# EAGLE board arduiana_here (EAGLE 9.6.2)
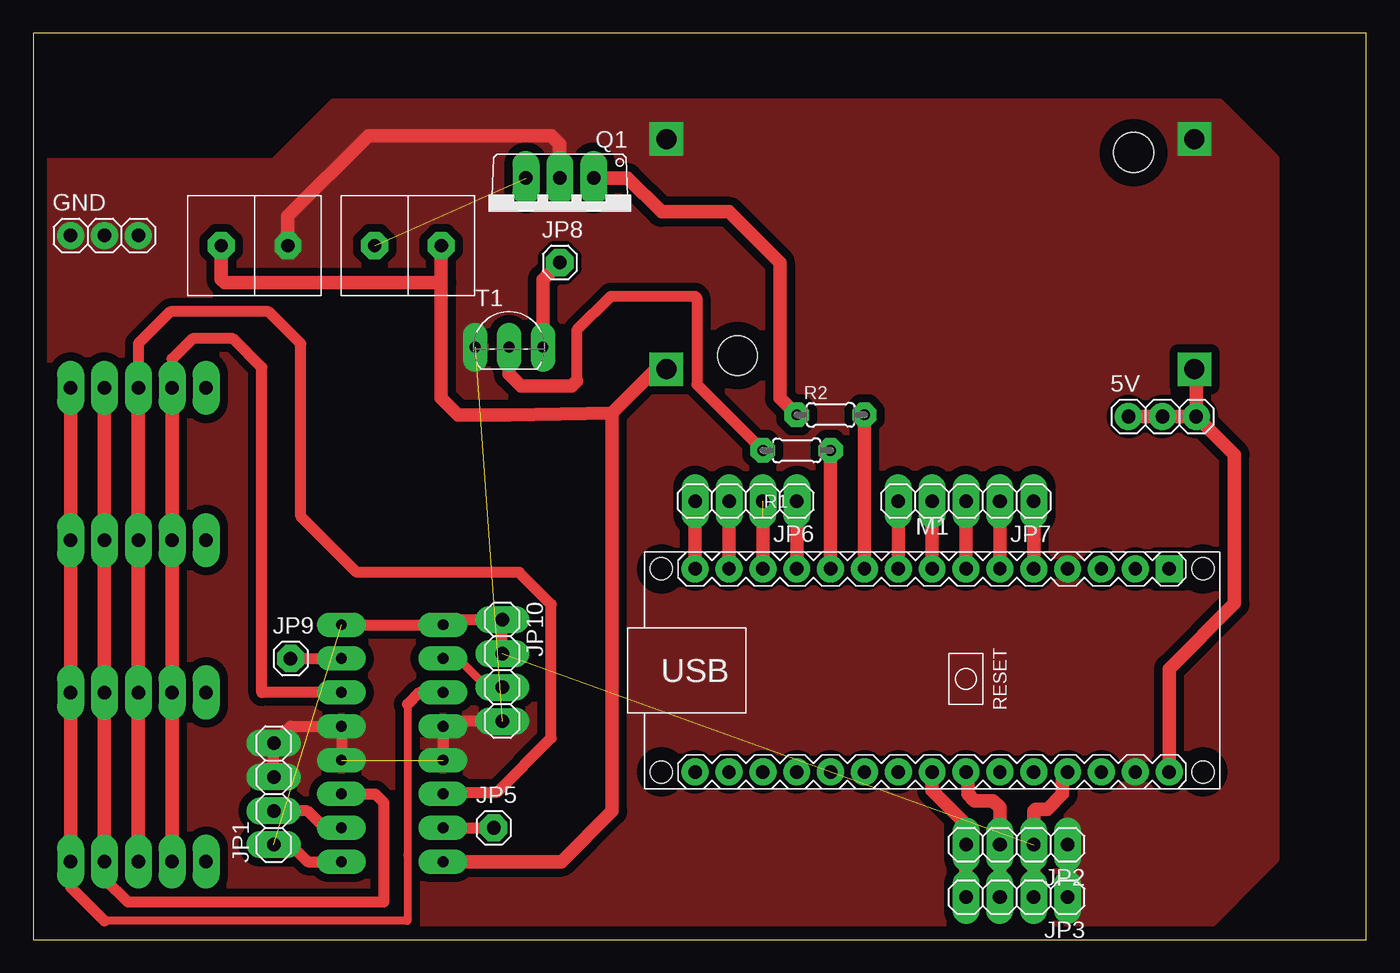
[diagram p0: board, top side]
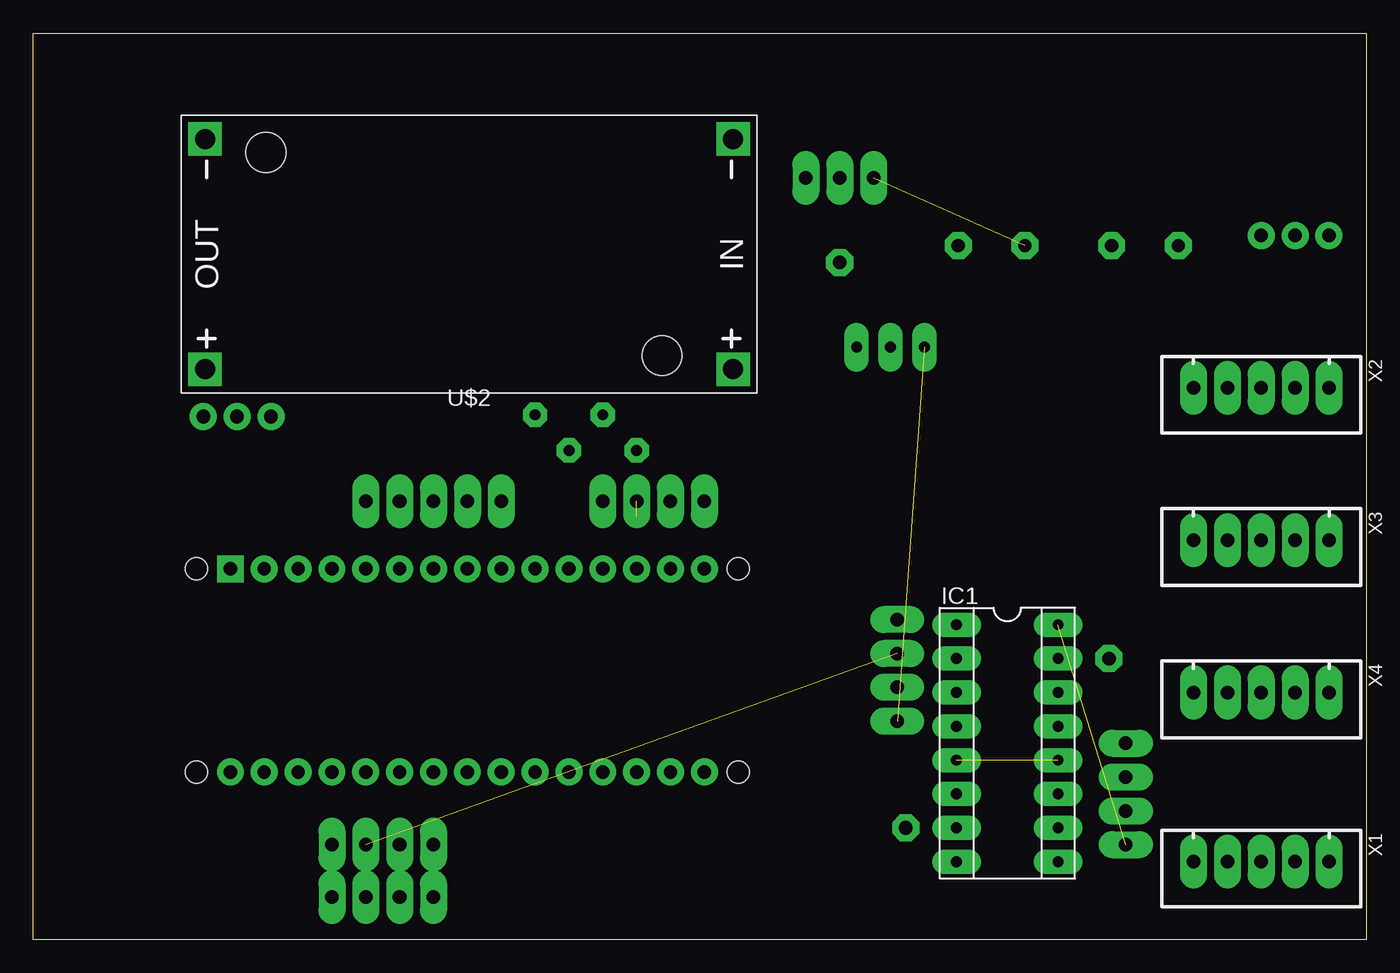
[diagram p1: board, bottom side, seen from below]

Size 100 x 68 mm. Coordinates in mm from the lower left corner, seen from the top.
Outline: 0,0 100,0 100,68 0,68 0,0
Copper layers (1*16): Top 0.035mm / dielectric 1.5mm / Bottom 0.035mm
Design rules "default *": minimum track width 6mil, minimum drill 0.35mm, track to track 6mil, track to pad 6mil, pad to pad 6mil, via to via 6mil, smd to smd 6mil, copper to edge 40mil, drill to drill 6mil, minimum pad ring 20mil, minimum via ring 8mil, stop-mask expansion 4mil, vias tented up to drill 0mil, thermal gap 0mil

## Footprints (pad centres in the part's own frame; a part is rotated, then mirrored left to right if it is on the bottom)
1X03 = drill 1.016: 1 -2.54,0; 2 0,0; 3 2.54,0
SOCKET-16 = drill 0.813 long: 1 -8.89,-3.81; 2 -6.35,-3.81; 3 -3.81,-3.81; 4 -1.27,-3.81; 5 1.27,-3.81; 6 3.81,-3.81; 7 6.35,-3.81; 8 8.89,-3.81; 9 8.89,3.81; 10 6.35,3.81; 11 3.81,3.81; 12 1.27,3.81; 13 -1.27,3.81; 14 -3.81,3.81; 15 -6.35,3.81; 16 -8.89,3.81
1X04 = drill 1.016 long: 1 -3.81,0; 2 -1.27,0; 3 1.27,0; 4 3.81,0
1X01 = drill 1.016 pad 1.93 octagon: 1 0,0
1X05 = drill 1.016 long: 1 -5.08,0; 2 -2.54,0; 3 0,0; 4 2.54,0; 5 5.08,0
ARDUINO-NANO-3.0 = drill 1 square: J1.1 17.78,7.62 | drill 1: J1.2 15.24,7.62; J1.3 12.7,7.62; J1.4 10.16,7.62; J1.5 7.62,7.62; J1.6 5.08,7.62; J1.7 2.54,7.62; J1.8 0,7.62; J1.9 -2.54,7.62; J1.10 -5.08,7.62; J1.11 -7.62,7.62; J1.12 -10.16,7.62; J1.13 -12.7,7.62; J1.14 -15.24,7.62; J1.15 -17.78,7.62; J2.1 17.78,-7.62; J2.2 15.24,-7.62; J2.3 12.7,-7.62; J2.4 10.16,-7.62; J2.5 7.62,-7.62; J2.6 5.08,-7.62; J2.7 2.54,-7.62; J2.8 0,-7.62; J2.9 -2.54,-7.62; J2.10 -5.08,-7.62; J2.11 -7.62,-7.62; J2.12 -10.16,-7.62; J2.13 -12.7,-7.62; J2.14 -15.24,-7.62; J2.15 -17.78,-7.62 | hole 1.651: -20.32,7.62; -20.32,-7.62; 20.32,-7.62; 20.32,7.62
DBCONN-1X2 = drill 1 pad 2 octagon: P0 -2.54,0; P1 2.46,0
TO220V = drill 1.016 long: 1 -2.54,-2.54; 2 0,-2.54; 3 2.54,-2.54
0204/5 = drill 0.813 pad 1.676 octagon: 1 -2.54,0; 2 2.54,0
TO92-EBC-OVAL = drill 0.813 long: B 0,-1.27; C 2.54,-1.27; E -2.54,-1.27
DC-DC-STEP-DOWN-LM2596 = drill 1.5 pad 2.5 square: IN+ -19.812,8.636; IN- -19.812,-8.636; OUT+ 19.812,8.636; OUT- 19.812,-8.636 | hole 3: -14.478,7.62; 15.24,-7.62
JST-XH-05-PACKAGE-LONG-PAD = drill 1.016 long: 1 -5.08,0; 2 -2.54,0; 3 0,0; 4 2.54,0; 5 5.08,0

## Placement (x,y rotation side)
5V  [1X03]  84.71,39.24 0 top
GND  [1X03]  5.33,52.83 0 top
IC1  [SOCKET-16]  26.92,14.73 270 bottom
JP1  [1X04]  18.03,10.92 90 top
JP2  [1X04]  73.79,7.11 180 top
JP3  [1X04]  73.79,3.17 180 top
JP5  [1X01]  34.54,8.38 0 top
JP6  [1X04]  53.47,32.89 180 top
JP7  [1X05]  69.98,32.89 180 top
JP8  [1X01]  39.5,50.8 0 top
JP9  [1X01]  19.3,21.08 0 top
JP10  [1X04]  35.18,20.19 270 top
M1  ARDUINO-NANO-3.0  [ARDUINO-NANO-3.0]  67.44,20.19 0 top
POWER  DBCONN-1X2  [DBCONN-1X2]  16.64,52.07 0 top
PUMP  DBCONN-1X2  [DBCONN-1X2]  28.07,52.07 180 top
Q1  [TO220V]  39.5,54.61 180 top
R1  [0204/5]  57.28,36.7 180 top
R2  [0204/5]  59.82,39.37 0 top
T1  2N2222  [TO92-EBC-OVAL]  35.69,45.72 0 top
U$2  DC-DC-STEP-DOWN-LM2596  [DC-DC-STEP-DOWN-LM2596]  67.31,51.44 180 bottom
X1  JST-XH-05-PIN-LONG-PAD  [JST-XH-05-PACKAGE-LONG-PAD]  7.87,5.84 180 bottom
X2  JST-XH-05-PIN-LONG-PAD  [JST-XH-05-PACKAGE-LONG-PAD]  7.87,41.4 180 bottom
X3  JST-XH-05-PIN-LONG-PAD  [JST-XH-05-PACKAGE-LONG-PAD]  7.87,29.97 180 bottom
X4  JST-XH-05-PIN-LONG-PAD  [JST-XH-05-PACKAGE-LONG-PAD]  7.87,18.54 180 bottom

## Library data of the parts
5V GND JP5 JP8 JP9 Q1 R1 R2 T1 = adafruit
IC1 = ic-package
JP1-JP3 JP6 JP7 JP10 = pinhead
M1 U$2 = diy-modules
POWER PUMP = Terminal Block Connector
X1-X4 = Rembrandt Electronics - JST XH Connectors v1-0

## Nets
3V3: M1.J2.14
GND: GND.1 GND.2 GND.3 IC1.4 IC1.5 IC1.12 IC1.13 JP1.3 JP1.4 JP2.1 JP3.1 JP10.4 M1.J1.4 M1.J2.2 POWER.P1 Q1.2 T1.E U$2.IN- U$2.OUT-
N$1: M1.J1.11 R1.1
N$2: IC1.2 JP10.3
N$3: M1.J1.10 R2.2
N$4: JP8.1 T1.C
N$5: R1.2 T1.B
N$6: Q1.1 R2.1
N$7: PUMP.P1 Q1.3
N$8: 5V.1 5V.2 5V.3 M1.J2.1 U$2.OUT+
N$9: JP2.4 JP3.4 M1.J2.8
N$10: JP2.3 JP3.3 M1.J2.7
N$12: JP7.1 M1.J1.5
N$13: JP6.1 M1.J1.12
N$14: JP6.2 M1.J1.13
N$15: JP7.2 M1.J1.6
N$16: IC1.7 JP5.1
N$17: IC1.10 JP1.2
N$18: IC1.15 JP9.1
N$19: IC1.1 IC1.9 IC1.16 JP1.1 JP2.2 JP3.2 JP10.1 JP10.2 M1.J2.4
N$20: IC1.3 X1.1 X2.1 X3.1 X4.1
N$21: IC1.6 X1.3 X2.3 X3.3 X4.3
N$22: IC1.11 X1.2 X2.2 X3.2 X4.2
N$23: IC1.14 X1.4 X2.4 X3.4 X4.4
N$24: JP7.3 M1.J1.7
N$25: JP7.4 M1.J1.8
N$26: JP7.5 M1.J1.9
N$27: JP6.3 M1.J1.14
N$28: JP6.4 M1.J1.15
PUMP: IC1.8 POWER.P0 PUMP.P0 U$2.IN+

## Tracks (layer width: path | path; a pad name or v marks a point on that pad's centre or on a via)
GND  (2 unrouted)
  Top 0.813: JP1.3 JP1.4 19.3,16 IC1.13 IC1.12 | JP10.4 31.11,16.38 IC1.4 IC1.5
  Top 1.016: Q1.2 39.5,59.69 38.86,60.33 25.15,60.33 19.1,54.28 POWER.P1 | JP2.1 JP3.1
  pour Top (isolate 0.61): 0,58.42 18.03,58.42 22.48,62.87 89.03,62.87 93.22,58.67 93.22,5.97 87.25,0 1.27,0 0,1.27
N$1
  Top 1.016: M1.J1.11 R1.1
N$2
  Top 0.61: 34.04,18.92 31.88,21.08
  Top 0.813: JP10.3 34.04,18.92 | 31.88,21.08 IC1.2
N$3
  Top 1.016: M1.J1.10 R2.2
N$4
  Top 1.016: T1.C 38.23,49.53 JP8.1
N$5
  Top 0.813: 40.77,41.91 40.77,45.72 43.31,48.26 49.66,48.26 49.78,48.13 49.78,41.66 R1.2 | 35.69,43.18 T1.B
  Top 1.016: 40.77,41.91 40.39,41.53 36.58,41.53 35.69,42.42 T1.B
N$6
  Top 1.016: R2.1 56.01,40.64 56.01,50.8 52.2,54.61 47.12,54.61 44.58,57.15 Q1.1
N$7  (1 unrouted)
N$8
  Top 1.016: 5V.3 87.25,42.67 U$2.OUT+ | 5V.1 5V.2 5V.3 | M1.J2.1 85.22,20.32 90.11,25.21 90.11,36.39 5V.3
N$9
  Top 1.016: M1.J2.8 67.44,11.18 69.98,8.64 JP2.4 JP3.4
N$10
  Top 1.016: JP2.3 72.52,8.89 | 69.98,12.45 M1.J2.7 70.1,12.45 70.1,10.92 70.61,10.41 72.01,10.41 72.52,9.91 JP2.3 | JP2.3 JP3.3
N$12
  Top 1.016: M1.J1.5 75.06,32.26 74.68,32.64 74.93,32.89 JP7.1
N$13
  Top 1.016: M1.J1.12 JP6.1
N$14  (1 unrouted)
  Top 1.016: M1.J1.13 54.74,31.75
N$15
  Top 1.016: M1.J1.6 JP7.2
N$16
  Top 0.813: IC1.7 JP5.1
N$17
  Top 0.813: JP1.2 20.57,9.65 21.84,8.38 IC1.10
N$18
  Top 0.813: JP9.1 IC1.15
N$19  (2 unrouted)
  Top 0.61: 77.6,11.94 M1.J2.4
  Top 0.813: JP10.2 JP10.1 31.11,24 IC1.1 IC1.16 | JP1.1 19.3,7.11 20.57,5.84 IC1.9
  Top 1.016: JP3.2 JP2.2 75.06,9.65 75.18,9.78 76.07,9.78 77.22,10.92 77.22,12.19 M1.J2.4
N$20
  Top 0.61: 28.07,17.65 28.07,6.35 28.07,1.4 5.33,1.4
  Top 0.813: IC1.3 28.96,18.54 28.07,17.65 | 5.33,1.4 2.79,3.94 X1.1
  Top 1.016: X2.1 X3.1 X4.1 X1.1
N$21
  Top 0.61: IC1.6 30.35,10.54
  Top 0.813: IC1.6 30.86,11.05 34.8,11.05 38.86,15.11 38.86,25.15 36.45,27.56 24.26,27.56 20.07,31.75 20.07,44.7 17.65,47.12 10.29,47.12 7.87,44.7 X2.3
  Top 1.016: X2.3 X3.3 X4.3 X1.3
N$22
  Top 0.813: IC1.11 25.65,10.92 26.29,10.29 26.29,2.79 7.11,2.79 5.33,4.57 X1.2
  Top 1.016: X1.2 X4.2 X3.2 X2.2
N$23
  Top 0.813: IC1.14 17.14,18.54 17.14,42.93 14.99,45.09 11.94,45.09 10.41,43.56 X2.4
  Top 1.016: X1.4 X4.4 X3.4 X2.4
N$24
  Top 1.016: M1.J1.7 JP7.3
N$25
  Top 1.016: M1.J1.8 JP7.4
N$26
  Top 1.016: M1.J1.9 JP7.5
N$27
  Top 1.016: M1.J1.14 JP6.3
N$28
  Top 1.016: M1.J1.15 JP6.4
PUMP
  Top 1.016: IC1.8 39.62,5.84 43.43,9.65 43.43,39.5 | U$2.IN+ 46.74,42.8 43.43,39.5 | 43.43,39.5 35.69,39.37 31.88,39.37 30.61,40.64 30.61,49.28 | 30.61,49.28 PUMP.P0 | POWER.P0 14.1,49.53 14.35,49.28 30.61,49.28